# Altium PCB AdjustableSupplyPower.PcbDoc
Units mil, origin at the board's own origin, x right, y up, seen from the top; angles counter-clockwise.
Board outline 9139.37 x 7042.72 mil, 2 copper layers (Top Layer, Top, Bottom Layer, Bottom); 15 components, 10 nets, 67 pads, 0 vias.
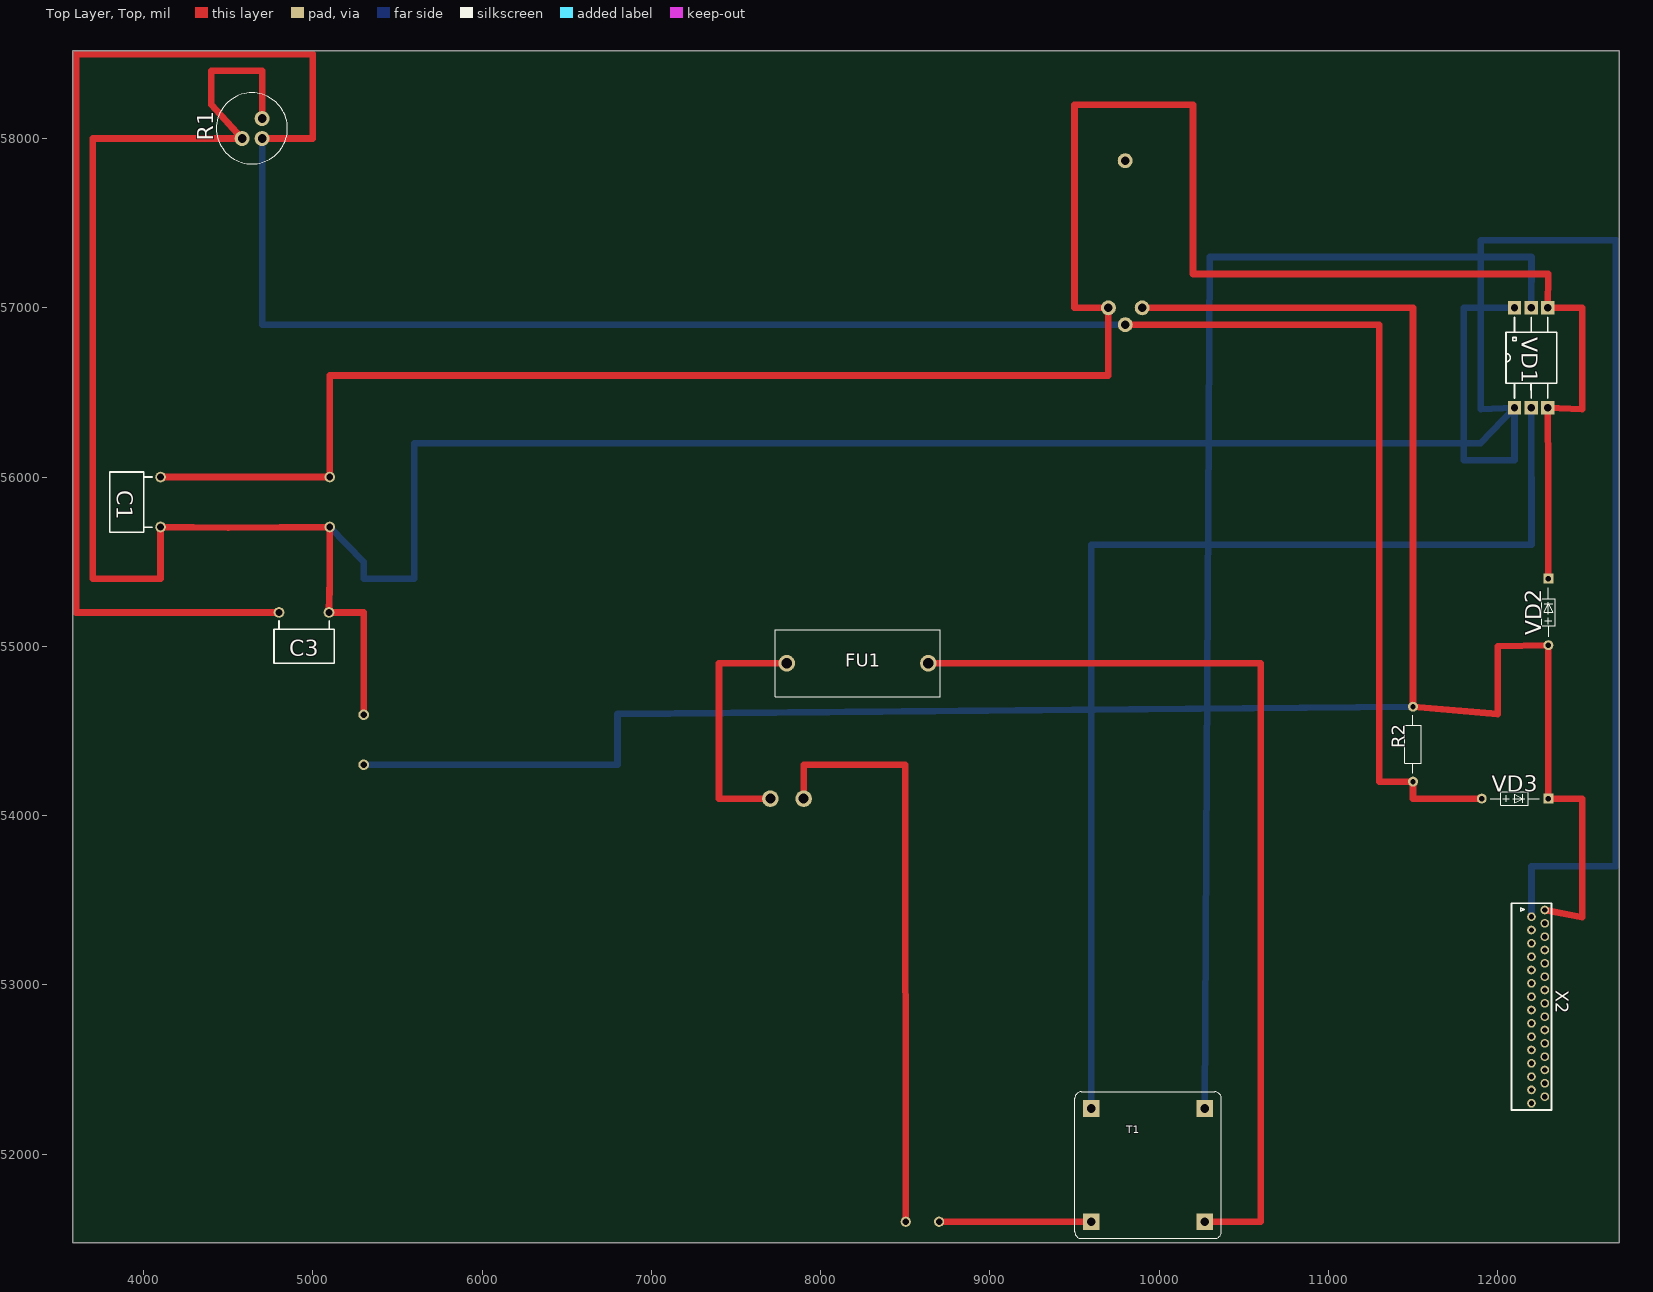
[diagram p0: Top Layer, Top view]
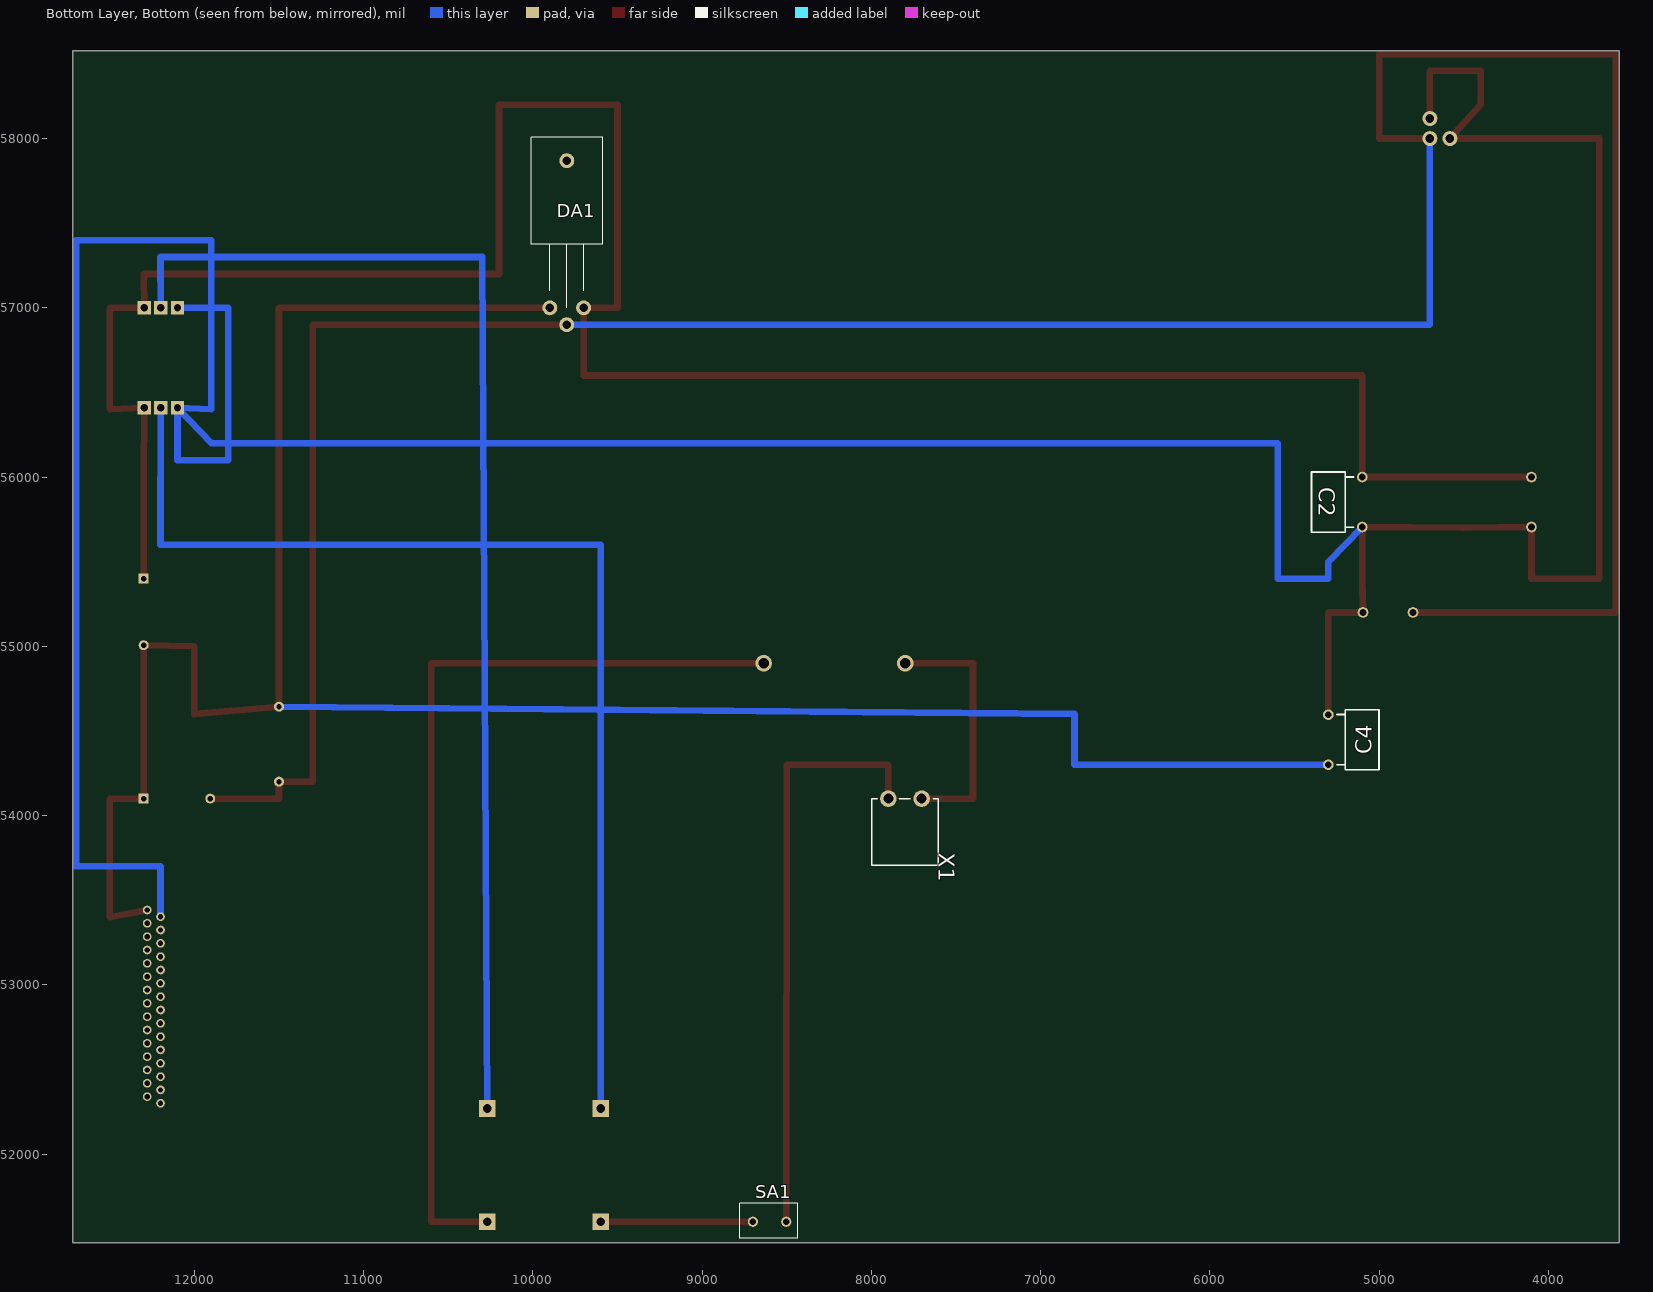
[diagram p1: Bottom Layer, Bottom view, seen from below]

## Layer stack, top to bottom
Top Solder, Top Mask: solder mask 0.4, Solder Resist, Dk 3.5
Top Layer, Top: signal copper 1.4
Dielectric 1: dielectric 12.6, FR-4, Dk 4.8
Bottom Layer, Bottom: signal copper 1.4
Bottom Solder, Bot Mask: solder mask 0.4, Solder Resist, Dk 3.5

## Board outline
3580.32,51476.97 12719.68,51476.97 12719.68,58519.68 3580.32,58519.68

## Design rules (kind name [scope] priority, off if disabled: settings)
Clearance [All] p1: gap=10 ignorepadtopadclearanceinfootprint=FALSE except(0: Arc-Hole Track-Hole SMDPad-Hole THPad-Hole Via-Hole Fill-Hole Poly-Hole Region-Hole Text-Hole; 11.81: Arc-Arc Arc-Track Arc-THPad Arc-Via Track-Track Track-THPad Track-Via THPad-THPad THPad-Via Via-Via)
PlaneClearance [All] p1: clearance=10
PolygonConnect [All] p1: connectstyle=Relief reliefconductorwidth=10 reliefentries=4 polygonreliefangle="90 Angle" airgapwidth=10
RoutingVias [All] p1: holewidth=28 width=50 viastyle="Through Hole" minholewidth=28 minwidth=50 maxholewidth=28 maxwidth=50
SolderMaskExpansion [All] p1: expansion=4
Width [All] p1: maxlimit=10 minlimit=10 preferedwidth=10
29 further rules are at their usual default settings.

## Components (designator, comment, footprint, x,y, rotation, side; value= is the part's Value field where it differs from the comment)
C1 "1000mk" 1017-B3R 4100,56000 r270 top
C2 "0,1mk" 1017-B3R 5100,56000 r270 bottom
C3 "10mk" 1017-B3R 4800,55200 r0 top
C4 "22mk" 1017-B3R 5300,54300 r90 bottom
DA1 "KP142EH12A" TO-220-KT-28-2 9900,57000 r180 bottom
FU1 "" FH-101C 7800,54900 r0 top
R1 "4,7k" SP5-16-025 4700,58000 r90 top
R2 "240" C2-33H-0.125W 11500,54200 r90 top
SA1 "" 8AS9M2RE 8700,51600 r180 bottom
T1 "{Value}" ÄÔÏÊ30-2/Õ 9600,51600 r0 top
VD1 "KC407A" KC407 12100,57000 r270 top
VD2 "KD522B" ÊÄ521(522)_ÊÄ522Á(Primary) 12300,55400 r90 top
VD3 "KD522B" ÊÄ521(522)_ÊÄ522Á(Primary) 12300,54100 r0 top
X1 "" 2XR 7900,54100 r270 bottom
X2 "" 30FMN 12200,52300 r270 top

## Footprints (in the part's own frame and the unit in brackets; to place one, negate y for a bottom-side part, rotate by r counter-clockwise, add the part's x,y. Pads: shape width x height; smd on the part's side, far side on the other; paste and mask are expansions set on the pad)
2XR [mm]
  round 2.5 hole 1.5: 1(0,0) 2(0,5)
  silkscreen extent 0,-2.5 10,7.5
8AS9M2RE [mil]
  round 60 hole 38: 1(0,0) 2(196.85,0)
  silkscreen extent -79,-98 266,108
30FMN [mm]
  round 1.3 hole 0.8: 1(-29,2) 2(-28,0) 3(-27,2) 4(-26,0) 5(-25,2) 6(-24,0) 7(-23,2) 8(-22,0) 9(-21,2) 10(-20,0) 11(-19,2) 12(-18,0) 13(-17,2) 14(-16,0) 15(-15,2) 16(-14,0) 17(-13,2) 18(-12,0) 19(-11,2) 20(-10,0) 21(-9,2) 22(-8,0) 23(-7,2) 24(-6,0) 25(-5,2) 26(-4,0) 27(-3,2) 28(-2,0) 29(-1,2) 30(0,0)
  silkscreen extent -30,-3 1,3
1017-B3R [mm]
  round 1.6 hole 1: 1(0,0) 2(7.5,0)
  silkscreen extent -0.76,-7.61 8.26,-1.25
C2-33H-0.125W [mm]
  round 1.5 hole 0.8: 1(0,0) 2(11.25,0)
  silkscreen extent 1.25,-1.25 10,1.25
FH-101C [mm]
  round 2.5 hole 1.6: 1(0,0) 2(21.25,0)
  silkscreen extent -1.75,-5 23,5
KC407 [mm]
  rect 2x2 hole 1.1: 1(0,0) 2(0,2.5) 3(0,5) 4(15,5) 5(15,2.5) 6(15,0)
  silkscreen extent 1.44,-1.27 13.57,6.35
SP5-16-025 [mm]
  round 2.25 hole 1.3: 1(3,0) 2(0,0) 3(0,3)
  silkscreen extent -3.81,-3.81 6.86,6.86
TO-220-KT-28-2 [mm]
  round 2.25 hole 1.3: 1(0,0) 2(2.54,-2.54) 3(5.08,0) 4(2.55,22.07)
  silkscreen extent -2.8,0 7.95,25.57
ÄÔÏÊ30-2/Õ [mm]
  rect 2.5x2.5 hole 1.3: 1(0,0) 2(17,0) 3(0,17) 4(17,17)
  silkscreen extent -2.5,-2.5 19.5,19.5
ÊÄ521(522)_ÊÄ522Á(Primary) [mm]
  round 1.5 hole 0.8: 1(-10,0)
  rect 1.5x1.5 hole 0.8: 2(0,0)
  silkscreen extent -8.71,-1.02 -1.4,1.02

## Nets (pads, with @x,y where several pads share a name; then routed paths per layer and width w, separated by ;. In a path a pad name is that pad's centre, name@x,y a point inside that pad or via, vN(x,y) a via of type N, cw(c..) or ccw(c..) an arc to the next point about the centre after c; other vN are vias at no path point)
NET00000: FU1.1 X1.2 | length 1503.1
  Top Layer, Top w39.37: X1.2 7400,54100 7400,54900 FU1.1
NET00001: SA1.2 X1.1 | length 3500
  Top Layer, Top w39.37: X1.1 7900,54300 8500,54300 SA1.2
NET00002: SA1.1 T1.1 | length 900
  Top Layer, Top w39.37: SA1.1 T1.1
NET00003: FU1.2 T1.2 | length 5594.1
  Top Layer, Top w39.37: FU1.2 10600,54900 10600,51600 T1.2
NET00004: T1.4 VD1.2 | length 7230.8
  Bottom Layer, Bottom w39.37: T1.4 10300,57300 12200,57300 VD1.2
NET00005: T1.3 VD1.5 | length 6740.2
  Bottom Layer, Bottom w39.37: T1.3 9600,55600 12200,55600 VD1.5
NET00007: C4.1 DA1.1 R2.2 VD2.1 VD3.2 X2.1 | length 13690.6
  Top Layer, Top w39.37: DA1.1 11500,57000 R2.2 12000,54600 12000,55000 VD2.1 VD3.2 12500,54100 12500,53400 X2.1
  Bottom Layer, Bottom w39.37: C4.1 6800,54300 6800,54600 R2.2
NET00008: C3.1 DA1.2 R1.2 R2.1 VD3.1 | length 17806.3
  Top Layer, Top w39.37: R1.2 5000,58000 5000,58500 3600,58500 3600,55200 C3.1 ; DA1.2 11300,56900 11300,54200 R2.1 11500,54100 VD3.1
  Bottom Layer, Bottom w39.37: R1.2 4700,56900 DA1.2
NET00009: C1.2 C2.2 C3.2 C4.2 R1.1 R1.3 VD1.1 VD1.6 X2.2 | length 23936.2
  Top Layer, Top w39.37: R1.1 4700,58400 4400,58400 4400,58200 R1.3 3700,58000 3700,55400 4100,55400 C1.2 4500,55700 C2.2 5100,55400 C3.2 5300,55200 C4.2
  Bottom Layer, Bottom w39.37: C2.2 5300,55500 5300,55400 5600,55400 5600,56200 11800,56198.41 ; VD1.1 11900,57000 ; X2.2 12200,53700 12700,53700 12700,57400 11900,57400 11900,57000 ; 11800,56198.41 11800,57000 11900,57000 ; 11800,56198.41 11800,56100 12100,56100 VD1.6 ; 11800,56198.41 11900,56200 VD1.6 ; 11900,57000 11900,56400 VD1.6
NET00010: C1.1 C2.1 DA1.3 VD1.3 VD1.4 VD2.2 | length 14016
  Top Layer, Top w39.37: C1.1 C2.1 5100,56600 9700,56600 DA1.3 9500,57000 9500,58200 10200,58200 10200,57200 12300,57200 VD1.3 12500,57000 12500,56400 VD1.4 12300,56000 VD2.2
pads on no net: DA1.4 X2.3 X2.4 X2.5 X2.6 X2.7 X2.8 X2.9 X2.10 X2.11 X2.12 X2.13 X2.14 X2.15 X2.16 X2.17 X2.18 X2.19 X2.20 X2.21 X2.22 X2.23 X2.24 X2.25 X2.26 X2.27 X2.28 X2.29 X2.30

## Text inside footprints (layer, text, board x,y; h text height)
T1: Mechanical 1, Top Assy "3" at 9580.32,52141.34 h36.91; Mechanical 1, Top Assy "1" at 9580.32,51668.9 h36.91; Mechanical 1, Top Assy "4" at 10249.61,52161.02 h36.91; Mechanical 1, Top Assy "2" at 10249.61,51659.06 h36.91